# Altium PCB PCB3.PcbDoc
Units mil, origin at the board's own origin, x right, y up, seen from the top; angles counter-clockwise.
Board outline 4055 x 3805 mil, 2 copper layers (Top Layer, Bottom Layer); 64 components, 57 nets, 210 pads, 13 vias.
Unrouted connection lines stored in the file: 1.
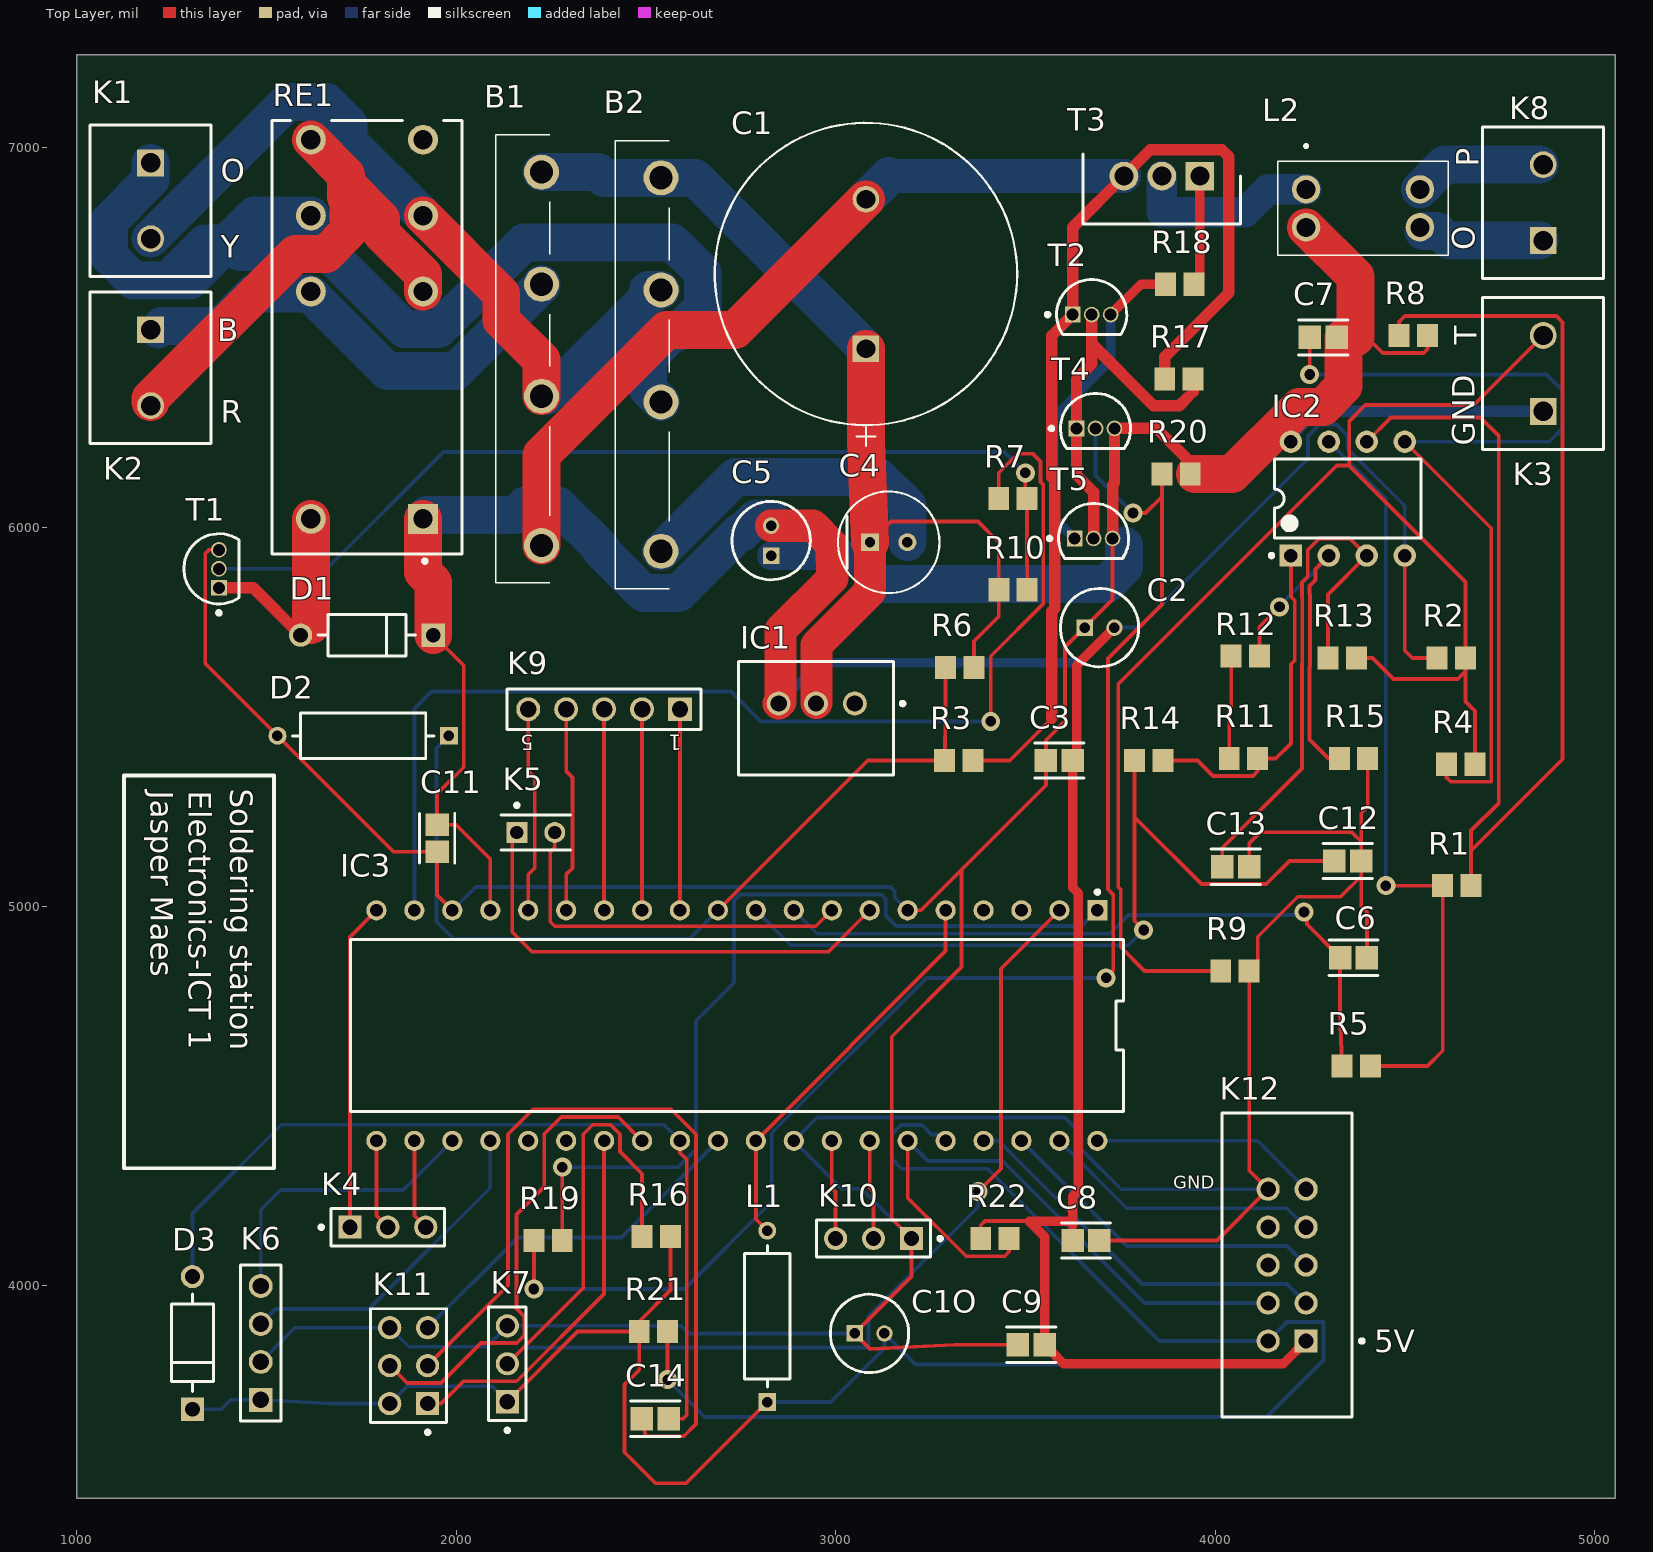
[diagram p0: Top Layer view]
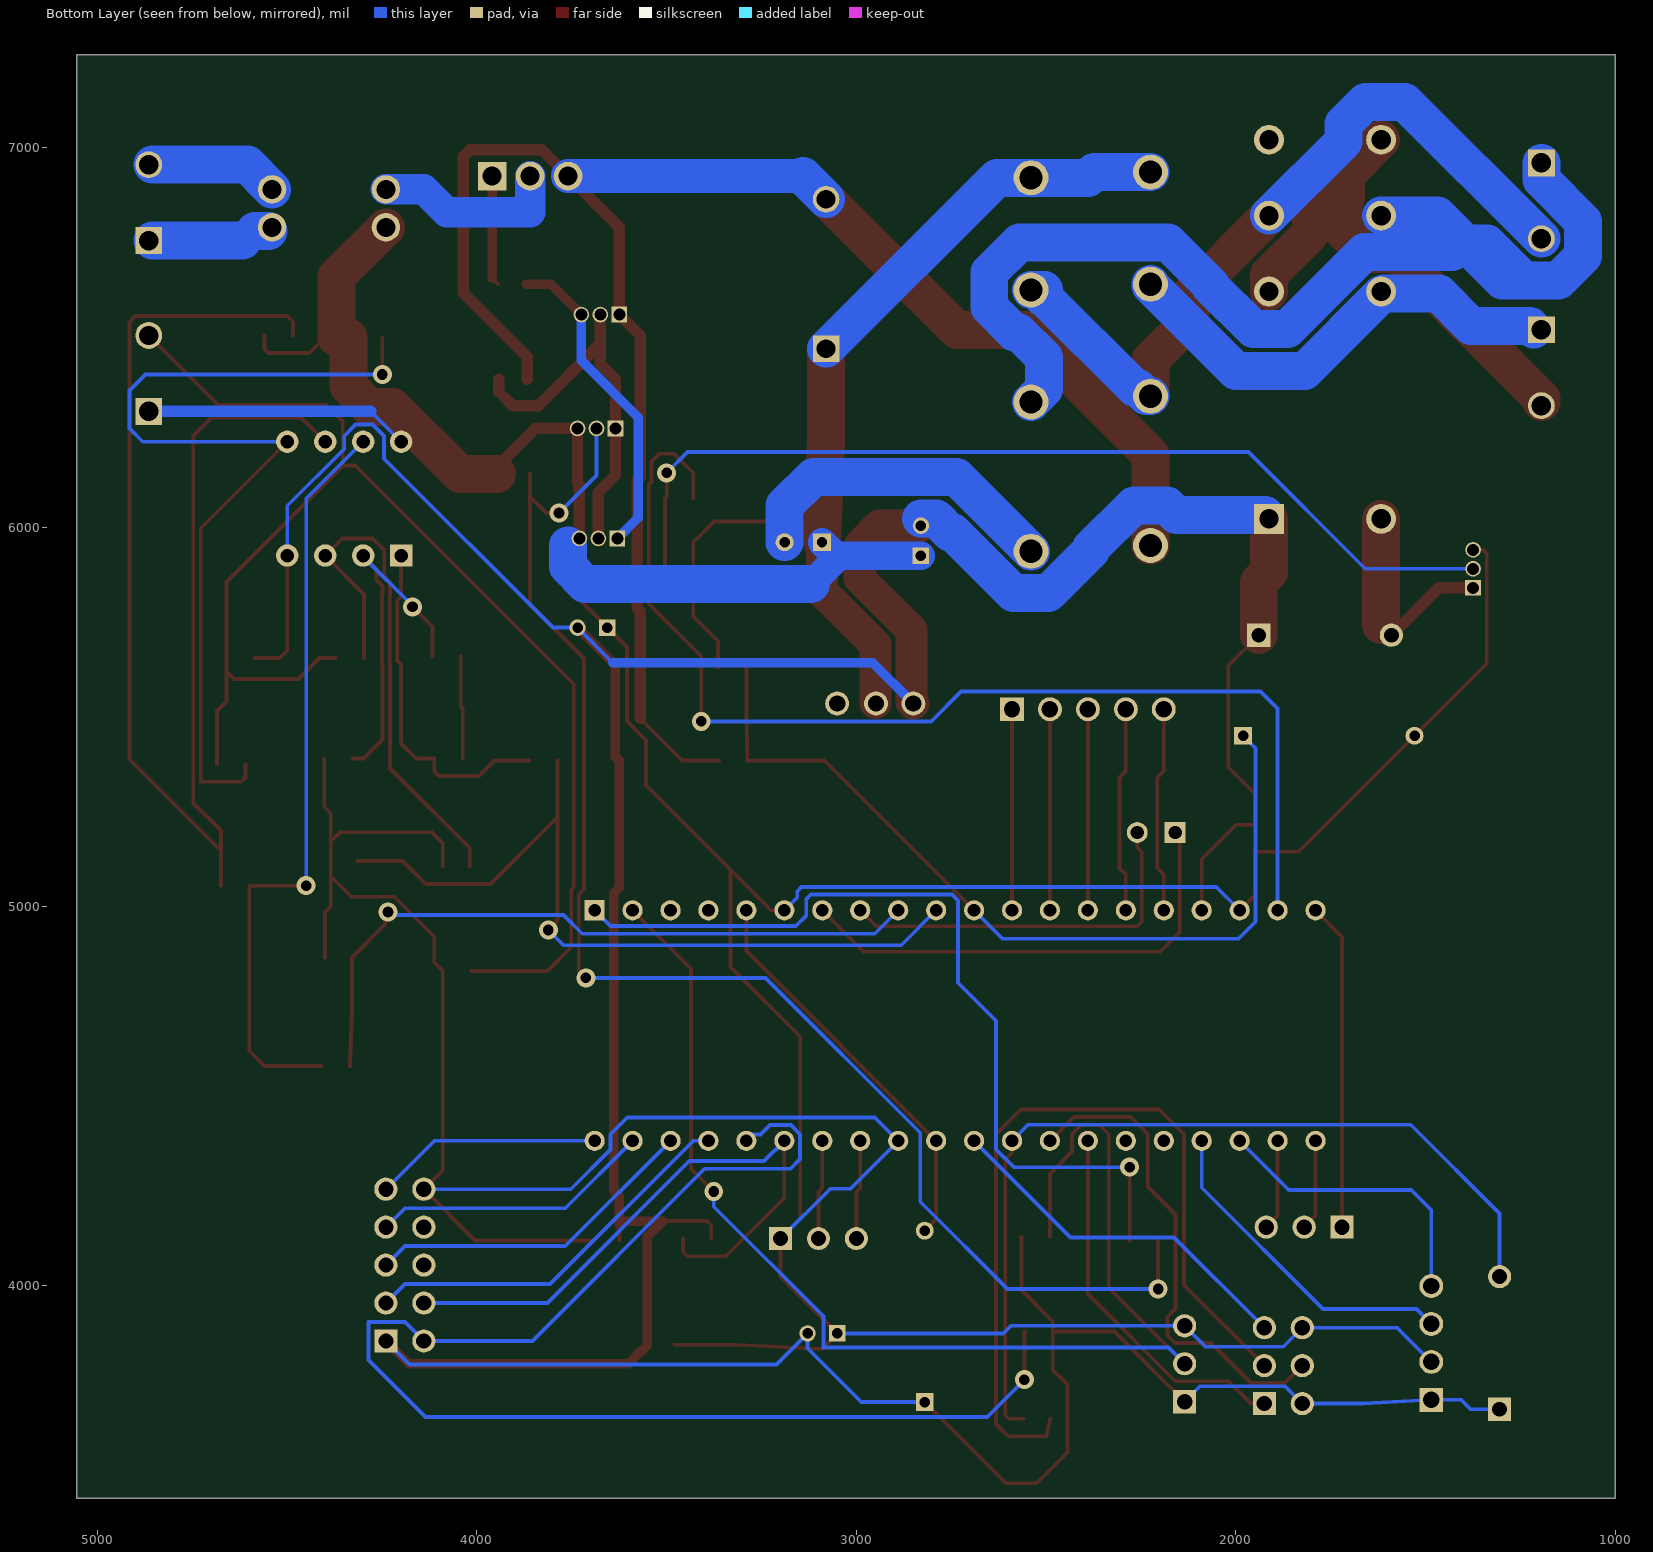
[diagram p1: Bottom Layer view, seen from below]
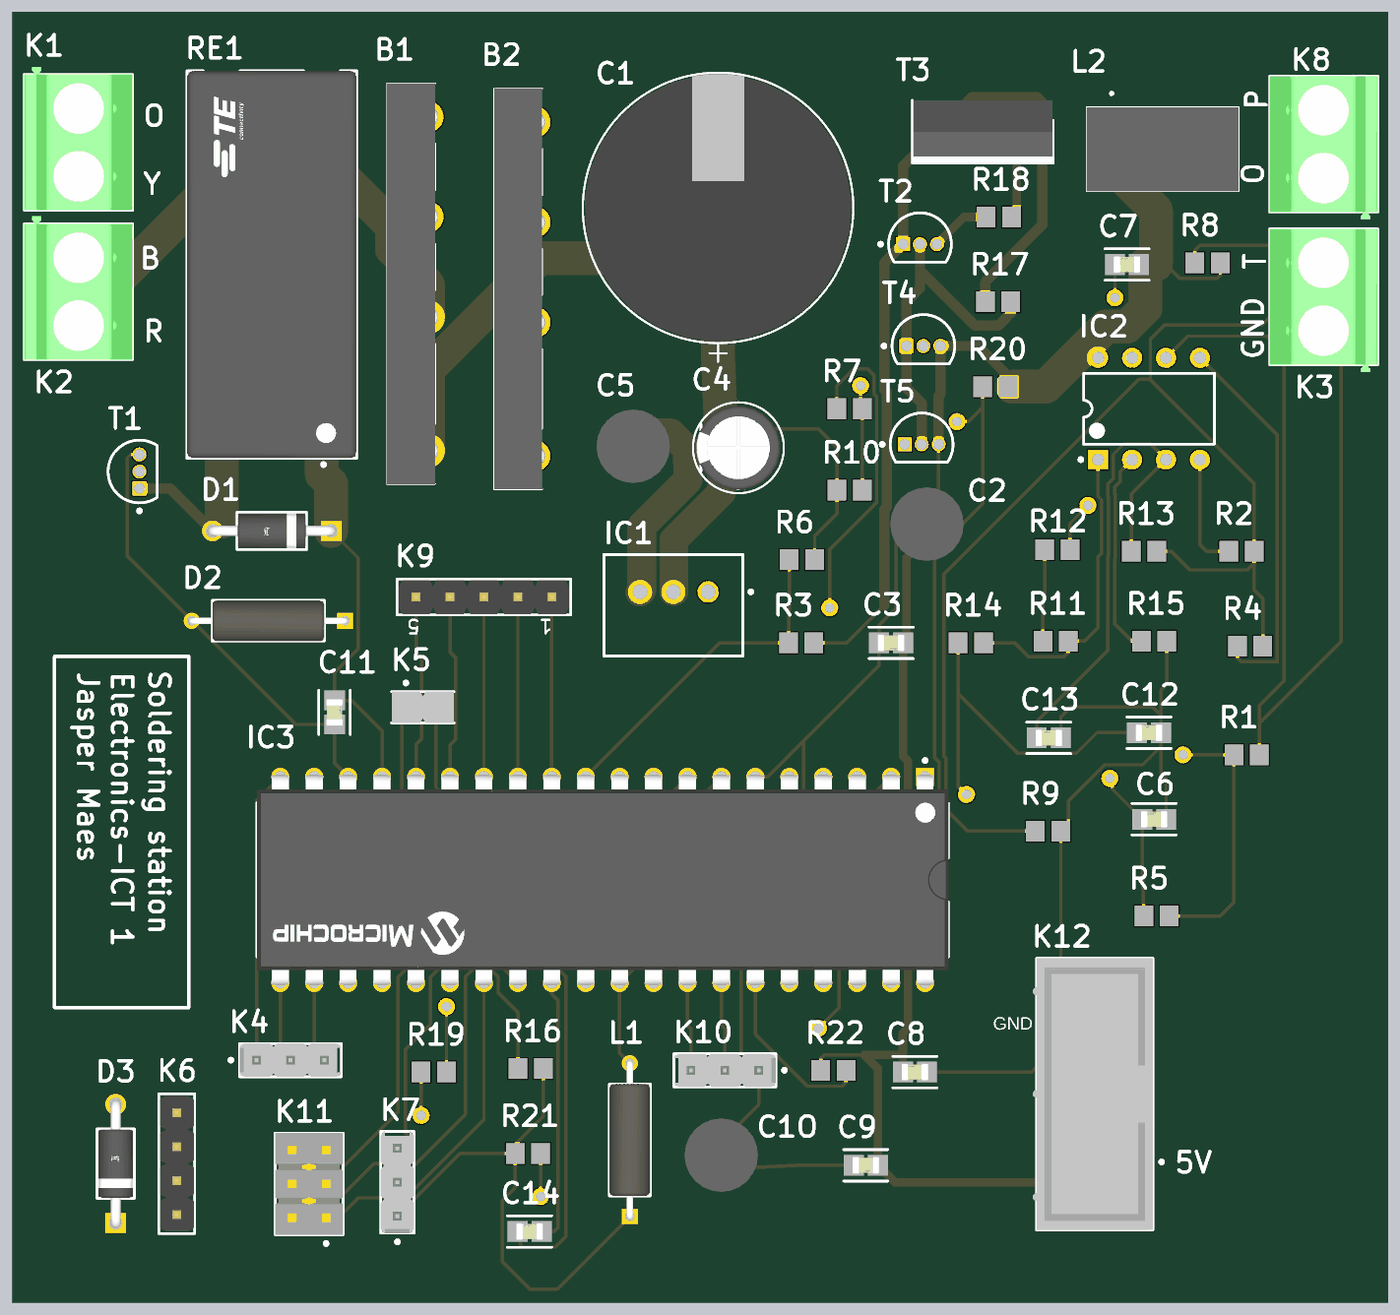
[diagram p2: 3D render of the assembled board from above, using the file's embedded part models]

## Layer stack, top to bottom
Top Solder: solder mask 0.4, Solder Resist, Dk 3.5
Top Layer: signal copper 1.4
Dielectric 1: dielectric 12.6, FR-4, Dk 4.8
Bottom Layer: signal copper 1.4
Bottom Solder: solder mask 0.4, Solder Resist, Dk 3.5

## Board outline
1000,3440 5055,3440 5055,7245 1000,7245

## Design rules (kind name [scope] priority, off if disabled: settings)
Clearance [All] p1: gap=10 ignorepadtopadclearanceinfootprint=FALSE except(0: Arc-Hole Track-Hole SMDPad-Hole THPad-Hole Via-Hole Fill-Hole Poly-Hole Region-Hole Text-Hole; 5: THPad-THPad)
Height [All] p1: minheight=0 maxheight=5000 prefheight=500
PolygonConnect [All] p1: connectstyle=Relief reliefconductorwidth=10 reliefentries=4 polygonreliefangle="90 Angle" airgapwidth=10
RoutingVias [All] p1: holewidth=28 width=50 viastyle="Through Hole" minholewidth=28 minwidth=50 maxholewidth=28 maxwidth=50
SolderMaskExpansion [All] p1: expansion=4 istentingtop=FALSE
UnRoutedNet [All] p1: checkbadconnections=TRUE
Width [All] p1: maxlimit=100 minlimit=10 preferedwidth=10 minimp=50.000000 maximp=50.000000 favimp=50.000000
28 further rules are at their usual default settings.

## Classes and differential pairs
component class Voeding: B1 B2 C1 C4 C5 D1 D2 IC1 K1 K2 R3 R6 R7 R10 RE1 T1
component class temperatuursmeting: C2 C3 C6 C7 C12 C13 IC2 K3 R1 R2 R4 R5 R8 R9 R11 R12 R13 R14 R15
component class Sturing_Bout: K8 L2 R17 R18 R20 T2 T3 T4 T5
component class Main_IC_Sheet: C1O C8 C9 C11 C14 D3 IC3 K4 K5 K6 K7 K9 K10 K11 K12 L1 R16 R19 R21 R22

## Components (designator, comment, footprint, x,y, rotation, side; value= is the part's Value field where it differs from the comment)
B1 "D6KB6U" GSIB1580E345 2225,5951.3 r90 top
B2 "D6KB6U" GSIB1580E345 2540,5936.02 r90 top
C1 "4700µ - 50V" U1-UU_NCH 3080,6470 r90 top
C1O "10µF" CAPPRD200W52D525H1200 3050,3875 r0 top value="0.10 μF"
C2 "10µ - 50V" CAPPRD200W52D525H1200 3656.26,5735 r0 top
C3 "100n" FP-C0805C-DN-IPC_A 3590,5385 r180 top value="0.10 μF"
C4 "100µ - 25V" FP-RAD-TH-D_6_3_0_5-L_11-MFG 3140,5960 r0 top
C5 "10µ - 50V" CAPPRD200W52D525H1200 2830,5925 r90 top
C6 "10n" FP-C0805C-DN-IPC_A 4365,4865 r0 top value="0.10 μF"
C7 "10n" FP-C0805C-DN-IPC_A 4285,6500 r0 top value="0.10 μF"
C8 "100nF" FP-C0805C-DN-IPC_A 3660,4120 r0 top value="0.10 μF"
C9 "100nF" FP-C0805C-DN-IPC_A 3515.46,3845 r180 top value="0.10 μF"
C11 "100nF" FP-C0805C-DN-IPC_A 1950,5180 r270 top value="0.10 μF"
C12 "10n" FP-C0805C-DN-IPC_A 4350,5120 r0 top value="0.10 μF"
C13 "10n" FP-C0805C-DN-IPC_A 4054.54,5105 r0 top value="0.10 μF"
C14 "100nF" FP-C0805C-DN-IPC_A 2524.54,3650 r0 top value="0.10 μF"
D1 "1N4007" FP-1N4007-MFG 1765,5715 r180 top value=15pF
D2 "5V1" FP-IR02-MFG 1755,5450 r180 top
D3 "1N4007" FP-1N4007-MFG 1305,3850 r90 top value=15pF
IC1 "OKI-78SR-5/1.5-W36-C" MURA-OKI-78SR-3 2948.43,5535 r180 top
IC2 "MCP6002-E/P" PDIP300-P8 4350,6075 r90 top
IC3 "ATMEGA4809-PF" FP-C04-016-MFG 2740,4686.25 r270 top
K1 "1729128" PHOE-1729128-2_V 1195,6860 r270 top
K2 "1729128" PHOE-1729128-2_V 1195,6420 r270 top
K3 "1729128" PHOE-1729128-2_V 4865,6405 r90 top
K4 "" MOLX-22-28-4033_V 1820,4155 r0 top
K5 "" TECO-5-146280-2_V 2210,5195 r0 top
K6 "UART2" 61300411121 1485,3850 r90 top
K7 "" MOLX-22-28-4033_V 2135,3795 r90 top
K8 "1729128" PHOE-1729128-2_V 4865,6855 r90 top
K9 "691701320005B" 61300511121 2390,5520 r180 top
K10 "UART0" MOLX-22-28-4033_V 3100,4125 r180 top
K11 "610106249121" SMTC-TSW-103-08-L-D_V 1875,3790 r90 top
K12 "" TECO-1-1634688-0-10_V 4190,4055 r90 top
L1 "10µH" FP-IR02-MFG 2820,3920 r90 top value=10uH
L2 "" CM2545X171B10 4240,6890 r270 top
R1 "18K" RESC2013X60X40ML20T25 4637.4,5055 r0 top
R2 "1M" RESC2013X60X40ML20T25 4622.4,5655 r0 top
R3 "68K" RESC2013X60X40ML20T25 3325,5385 r0 top
R4 "5K6" RESC2013X60X40ML20T25 4647.6,5375 r0 top
R5 "5K6" RESC2013X60X40ML20T25 4372.4,4580 r0 top
R6 "10K" RESC2013X60X40ML20T25 3327.4,5630 r0 top
R7 "10K" RESC2013X60X40ML20T25 3467.4,6075 r0 top
R8 "100E" RESC2013X60X40ML20T25 4522.6,6505 r0 top
R9 "10M" RESC2013X60X40ML20T25 4052.6,4830 r0 top
R10 "4,7K" RESC2013X60X40ML20T25 3467.6,5835 r0 top
R11 "18K" RESC2013X60X40ML20T25 4075,5390 r0 top
R12 "18K" RESC2013X60X40ML20T25 4080,5660 r0 top
R13 "5K6" RESC2013X60X40ML20T25 4335,5655 r0 top
R14 "5K6" RESC2013X60X40ML20T25 3825,5385 r0 top
R15 "100E" RESC2013X60X40ML20T25 4365,5390 r0 top
R16 "4.7K" RESC2013X60X40ML20T25 2527.6,4130 r0 top
R17 "4,7K" RESC2013X60X40ML20T25 3905,6390 r0 top
R18 "100E" RESC2013X60X40ML20T25 3907.4,6640 r0 top
R19 "10k" RESC2013X60X40ML20T25 2242.4,4120 r0 top
R20 "4,7K" RESC2013X60X40ML20T25 3897.4,6140 r0 top
R21 "4,7k" RESC2013X60X40ML20T25 2520,3880 r0 top
R22 "4,7k" RESC2013X60X40ML20T25 3420,4125 r0 top
RE1 "RT424005F" FP-RT424005F-MFG 1765,6500 r90 top
T1 "BC547" ONSC-TO-92-3-29-11 1375,5890 r90 top
T2 "BC547CG" ONSC-TO-92-3-29-11 3675,6560 r0 top
T3 "IRF9Z34NPBF" TO254P469X1042X1967-3P 3960,6925 r180 top
T4 "BC547CG" ONSC-TO-92-3-29-11 3685,6260 r0 top
T5 "BC557C" ONSC-TO-92-3-29-11 3680,5970 r0 top

## Footprints (in the part's own frame and the unit in brackets; to place one, negate y for a bottom-side part, rotate by r counter-clockwise, add the part's x,y. Pads: shape width x height; smd on the part's side, far side on the other; paste and mask are expansions set on the pad)
61300411121 [mm] "Pin Header, pitch 2.54 mm, THT, Vertical, single row, 4p"
  rect 1.6x1.6 hole 1.1: 1(-3.81,0)
  round 1.6 hole 1.1: 2(-1.27,0) 3(1.27,0) 4(3.81,0)
  silkscreen extent -5.23,-1.34 5.23,1.34, body extent -5.08,-1.27 5.08,1.27, height 8.57
61300511121 [mm] "Pin Header, pitch 2.54 mm, THT, Vertical, single row, 5p"
  rect 1.6x1.6 hole 1.1: 1(-5.08,0)
  round 1.6 hole 1.1: 2(-2.54,0) 3(0,0) 4(2.54,0) 5(5.08,0)
  silkscreen extent -6.5,-1.34 6.5,1.34, body extent -6.35,-1.27 6.35,1.27, height 8.57
CAPPRD200W52D525H1200 [mm]
  rect 1.1x1.1 / inner round 1.1 / far side rect 1.1x1.1 hole 0.7: 1(0,0)
  round 1.1 hole 0.7: 2(2,0)
  silkscreen extent -1.62,-2.62 3.63,2.62, body extent -10,-3.38 10,3.38, height 5.8
CM2545X171B10 [mil]
  round 75 hole 50: 1(0,0) 2(100,0) 3(100,300) 4(0,300)
  silkscreen extent -118,-74 174,374, body extent -394,-133 394,133, height 228
FP-1N4007-MFG [mm]
  rect 1.55x1.55 hole 1 paste-1000 mask+0: 1(-4.44,0)
  round 1.55 hole 1 paste-1000 mask+0: 2(4.44,0)
  silkscreen extent -3.27,-1.4 3.27,1.4, body extent -5.32,-1.5 5.32,1.5, height 0.25
FP-C04-016-MFG [mm]
  rect 1.35x1.35 hole 0.85 paste-1000 mask+0: 1(-7.715,24.13)
  round 1.35 hole 0.85 paste-1000 mask+0: 2(-7.715,21.59) 3(-7.715,19.05) 4(-7.715,16.51) 5(-7.715,13.97) 6(-7.715,11.43) 7(-7.715,8.89) 8(-7.715,6.35) 9(-7.715,3.81) 10(-7.715,1.27) 11(-7.715,-1.27) 12(-7.715,-3.81) 13(-7.715,-6.35) 14(-7.715,-8.89) 15(-7.715,-11.43) 16(-7.715,-13.97) 17(-7.715,-16.51) 18(-7.715,-19.05) 19(-7.715,-21.59) 20(-7.715,-24.13) 21(7.715,-24.13) 22(7.715,-21.59) 23(7.715,-19.05) 24(7.715,-16.51) 25(7.715,-13.97) 26(7.715,-11.43) 27(7.715,-8.89) 28(7.715,-6.35) 29(7.715,-3.81) 30(7.715,-1.27) 31(7.715,1.27) 32(7.715,3.81) 33(7.715,6.35) 34(7.715,8.89) 35(7.715,11.43) 36(7.715,13.97) 37(7.715,16.51) 38(7.715,19.05) 39(7.715,21.59) 40(7.715,24.13)
  silkscreen extent -9.07,-25.88 5.76,25.88, body extent -8.49,-26.71 8.49,26.71, height 0.25
FP-C0805C-DN-IPC_A [mil]
  rect 59.24x61.27 smd paste+0 mask+0: 1(-35.46,0) 2(35.46,0)
  silkscreen extent -65,-46 65,46, body extent -85,-50 85,50, height 10
FP-IR02-MFG [mm]
  rect 1.2x1.2 hole 0.7 paste-1000 mask+0: 1(-5.736,0)
  round 1.2 hole 0.7 paste-1000 mask+0: 2(5.736,0)
  silkscreen extent -4.74,-1.53 4.74,1.53, body extent -6.44,-1.63 6.44,1.63, height 0.25
FP-RAD-TH-D_6_3_0_5-L_11-MFG [mm]
  rect 1.2x1.2 hole 0.7 paste-1000 mask+0: 1(-1.25,0)
  round 1.2 hole 0.7 paste-1000 mask+0: 2(1.25,0)
  silkscreen extent -3.4,-3.4 3.4,3.4, body extent -3.5,-3.5 3.5,3.5, height 0.25
FP-RT424005F-MFG [mm]
  round 2 hole 1.3 paste-1000 mask+0: 11(8.15,-3.75) 12(3.07,-3.75) 14(13.23,-3.75) 21(8.15,3.75) 22(3.07,3.75) 24(13.23,3.75) A2(-12.15,3.75)
  rect 2x2 hole 1.3 paste-1000 mask+0: A1(-12.15,-3.75)
  silkscreen extent -15.1,-6.35 14.5,6.35, body extent -14.6,-6.45 14.6,6.45, height 0.25
GSIB1580E345 [mm]
  round 2.34 hole 1.56: 1(0,0) 2(10,0) 3(17.5,0) 4(25,0)
  silkscreen extent -2.5,-0.55 27.5,3.05, body extent -10,-3.38 10,3.38, height 5.8
MOLX-22-28-4033_V [mm] "THD, 3-Leads, Body 7.62x2.49mm, Pitch 2.54mm"
  rect 1.55x1.55 hole 1.02: 1(-2.54,0)
  round 1.55 hole 1.02: 2(0,0) 3(2.54,0)
  silkscreen extent -4.58,-1.25 3.81,1.25, body extent -3.81,-1.24 3.81,1.24, height 8.38
MURA-OKI-78SR-3 [mm] "THMT, 3-Leads, Body 10.4x7.6mm"
  round 1.6 hole 1.1: 1(-2.6,0) 2(0,0) 3(2.5,0)
  silkscreen extent -5.92,-2.8 5.2,4.8, body extent -5.2,-2.8 5.2,4.8, height 16.5
ONSC-TO-92-3-29-11 [mm] "TO, 3-Leads, Body Dia 4.7mm, Pitch 1.27mm"
  rect 1.05x1.05 hole 0.8: 1(-1.27,0)
  round 1.05 hole 0.8: 2(0,0) 3(1.27,0)
  silkscreen extent -3.07,-1.34 2.35,2.35, body extent -2.35,-1.33 2.36,2.36, height 7.87
PDIP300-P8 [mm] "8-Pin Plastic Dual In-Line Package (PDIP)"
  rect 1.5x1.5 hole 0.9: 1(-3.81,3.81)
  round 1.5 hole 0.9: 2(-3.81,1.27) 3(-3.81,-1.27) 4(-3.81,-3.81) 5(3.81,-3.81) 6(3.81,-1.27) 7(3.81,1.27) 8(3.81,3.81)
  silkscreen extent -3.93,-4.9 2.65,5.23, body extent -3.55,-4.9 3.55,4.9, height 4.32
PHOE-1729128-2_V [mm] "Receptacle, 2-Leads, Body 8.1x10.16mm, Pitch 5.08mm"
  rect 1.8x1.8 hole 1.3: 1(-2.54,0)
  round 1.8 hole 1.3: 2(2.54,0)
  silkscreen extent -5.08,-4.05 5.08,4.05, body extent -5.65,-4.05 5.08,4.05, height 10.01
RESC2013X60X40ML20T25 [mm] "Chip Resistor, 2-Leads, Body 2.00x1.25mm, IPC Low Density"
  rect 1.4x1.55 smd: 1(-0.95,0) 2(0.95,0)
  body extent -1.1,-0.72 1.1,0.72, height 0.6
SMTC-TSW-103-08-L-D_V [mm] "CONN, 6-Leads, Body 7.62x5.08mm, Pitch 2.54mm"
  rect 1.55x1.55 hole 1.02: 1(-2.54,-1.27)
  round 1.55 hole 1.02: 2(-2.54,1.27) 3(0,-1.27) 4(0,1.27) 5(2.54,-1.27) 6(2.54,1.27)
  silkscreen extent -4.58,-2.54 3.81,2.54, body extent -3.81,-2.54 3.81,2.54, height 8.38
TECO-1-1634688-0-10_V [mm] "10-Pin Connector, Body 20.35x8.7mm, Pitch 2.54mm"
  rect 1.55x1.55 hole 1.02: 1(-5.08,-1.27)
  round 1.55 hole 1.02: 2(-5.08,1.27) 3(-2.54,-1.27) 4(-2.54,1.27) 5(0,-1.27) 6(0,1.27) 7(2.54,-1.27) 8(2.54,1.27) 9(5.08,-1.27) 10(5.08,1.27)
  silkscreen extent -10.18,-5.13 10.18,4.35, body extent -10.17,-4.35 10.18,4.65, height 9
TECO-5-146280-2_V [mm] "Connector, 2-Leads, Body 4.67x2.34mm, Pitch 2.54mm"
  rect 1.4x1.4 hole 0.89: 1(-1.27,0)
  round 1.4 hole 0.89: 2(1.27,0)
  silkscreen extent -2.34,-1.17 2.34,1.94, body extent -2.34,-1.17 2.34,1.17, height 5.33
TO254P469X1042X1967-3P [mm]
  rect 1.92x1.92 / inner round 1.92 / far side rect 1.92x1.92 hole 1.28: 1(0,0)
  round 1.92 hole 1.28: 2(2.54,0) 3(5.08,0)
  silkscreen extent -2.73,-1.49 7.81,3.2, body extent -10,-3.38 10,3.38, height 5.8
U1-UU_NCH [mil]
  rect 70x70 / inner round 60 / far side rect 70x70 hole 50 paste-35 mask+0: 1(0,0)
  round 70 / inner round 60 / far side round 70 hole 50 paste-35 mask+0: 2(394,0)
  silkscreen extent -256,-398 595,398, body extent -196,-393 591,393, height 1566

## Part data
B1 B2: library part GSIB1580-E3_45, "Bridge Rectifier Diode 15A 800V GSIB-5S", Manufacturer_Name=Vishay, Manufacturer_Part_Number=GSIB1580-E3/45, Mouser Part Number=625-GSIB1580-E3, Datasheet Link=http://www.vishay.com/docs/88644/gsib15xx.pdf, Geometry.Height=20.3mm, Mouser Price/Stock=https://www.mouser.co.uk/ProductDetail/Vishay-General-Semiconductor/GSIB1580-E3-45?qs=NyKJzQ80QAwZu8Guxd36Tw%3D%3D
C1 C2 C4 C5: library part CMP-05427-000897-1, "Aluminum Electrolytic Capacitors (Radial Lead Type) 100uF ±20% 25V", Capacitance=100uF, Case/Package=Radial, ESR (Equivalent Series Resistance)=130mR, Max Operating Temperature=105°C, Min Operating Temperature=-40°C, Package Quantity=2000, Ripple Current=455mA, Tolerance=20%, Voltage Rating=25V, Diameter=6.3mm, Features="General Purpose", Height=11.2mm, Height - Seated (Max)=0.441inch, Impedance=130mR, Lead Diameter=0.5mm, Lead Free="Lead Free", Lead Pitch=5mm, Length=11.2mm, Life (Hours)=2000Hour, Mount="Through Hole", Packaging="Tape and Reel", Polarity=Polar, Radiation Hardening=No, RoHS Compliant=Yes, Series=FR, Termination=Radial, Voltage Rating (DC)=25V
C1O C3 C6 C7 C8 C9 C11 C12 C13 C14: library part CMP-2007-00279-2, "CAP CER 0.1UF 50V X7R 0805", Capacitance="0.10 μF", Manufacturer=KEMET, Manufacturer Part Number=C0805C104K5RACTU, Package=C0805C-DN, Temperature="-55°C to +125°C", Temperature Characteristic=X7R, Temperature Coefficient=30ppm/°C, Temperature Range High=+125°C, Temperature Range Low=-55°C, Tolerance=0.1, Voltage Rating="50 V", Automotive=No, Category=Cap, ComponentLink2Description=Datasheet, ComponentLink2URL=https://content.kemet.com/datasheets/KEM_C1003_C0G_SMD.pdf, Device Class L1="Passive Components", Device Class L2=Capacitors, Device Class L3="Ceramic Capacitors", Digikey Description="CAP CER 0.1UF 50V X7R 0805", Height=0.88mm, Ipc Land Pattern Name=CAPC200125X78, Lead Free=Yes, Material=Ceramic, Mouser Description="Cap Ceramic 0.1uF 50V X7R 10% SMD 2.0 x 1.2 mm 125 C Paper T/R", Octopart=https://octopart.com/c0805c104k5ractu-kemet-143926, RoHS=TRUE
D1 D3: library part CMP-123542-000001-1, "Rectifier diode 1000 V 1 A DO-41, ,", Capacitance=15pF, Forward Current=1A, Manufacturer=Diotec, Max Junction Temp=+175°C, Max Repetitive Reverse Voltage=1000V, Max Surge Forward Current=27A, Peak Reverse Current=5uA, Temperature="-50°C to +175°C", Temperature Range Low=-50°C, Automotive=No, Category=Diode, ComponentLink2Description=Datasheet, ComponentLink2URL=https://datasheet.octopart.com/1N4007-Diotec-datasheet-62346875.pdf, Device Class L1="Discrete Semiconductors", Device Class L2=Diodes, Device Class L3="Rectifier Diodes", Height=2.8mm, Ipc Land Pattern Name=DIOAD888W100L520D280, Lead Free=Yes, Manufacturer Part Number=1N4007, Octopart=https://octopart.com/1n4007-diotec-4040411, Package=1N4007, Reverse Voltage=1000V, RoHS=TRUE, Temperature Range High=+175°C
D2: library part CMP-1060-00390-1, "Zener Voltage Regulator, 500 mW, 2-Pin SOD-123, Pb-Free, Tape and Reel", Manufacturer="On Semiconductor", PartNumber=MMSZ4689ET1G, ComponentLink1Description="Manufacturer URL", ComponentLink1URL=http://www.onsemi.com/, ComponentLink2Description=Datasheet, ComponentLink2URL=http://www.onsemi.com/pub_link/Collateral/MMSZ4678ET1-D.PDF, ComponentLink3Description="Package Specification", ComponentLink3URL=http://www.onsemi.com/pub_link/Collateral/425-04.PDF, DatasheetVersion="Rev. 6", Mounting Technology="Surface Mount", P Max (W)=0.5, PackageDescription="2-Pin SOD, Body 1.6 x 2.69 mm", PackageReference=SOD-123-2-425-04, PackageVersion="Rev. G, 10/2009", Packing="Tape and Reel", RoHS=Pb-Free, VZ Typ (V)=5.1
IC1: library part CMP-2000-05274-1, "Non-Isolated DC/DC Converter, 7.5 W, 7 to 36 V, 1.5 A, -40 to 85 degC, 3-Pin THD, RoHS", Current - Output (Max)=1.5A, Manufacturer=Murata, Operating Temperature=-40degC~85degC, Package / Case=3-SIPModule, Power (Watts) - Manufacture Series=8W, Voltage - Input (Max)=36V, Voltage - Input (Min)=7V, Voltage - Isolation=-, Voltage - Output 1=5V, Applications=ITE(Commercial), Category=PowerSupplies-BoardMount, Datasheet URL=https://datasheet.ciiva.com/8006/1790439-8006672.pdf, Datasheet Version=Oct-13, Efficiency=90.5%, Family=DCDCConverters, Features=SCP, Manufacturer URL=http://www.murata.com/, Mounting Type=ThroughHole, Number of Outputs=1, Packaging=Tube, Power (Watts) - Max=8W, Series=Okami™OKI-78SR, Size / Dimension="0.41\"Lx0.30\"Wx0.65\"H(10.4mmx7.6mmx16.5mm)", Type=LinearRegulatorReplacement, Voltage - Output 2=-, Voltage - Output 3=-
IC2: library part CMP-0187-00133-3, "None", Case/Package=PDIP, Input Bias Current=1pA, Input Offset Voltage (Vos)=4.5mV, Max Operating Temperature=125°C, Max Supply Voltage=6V, Min Operating Temperature=-40°C, Min Supply Voltage=1.8V, Nominal Supply Current=100uA, Operating Supply Voltage=5.5V, Output Current=23mA, Package Quantity=60, Power Supply Rejection Ratio (PSRR)=86dB, Voltage Gain=112dB, Amplifier Type="GENERAL PURPOSE", Bandwidth=1MHz, Common Mode Rejection Ratio=60dB, Gain Bandwidth Product=1MHz, Height=3.3mm, Input Offset Voltage-Max=4.5mV, Lead Free="Lead Free", Length=9.27mm, Mount="Through Hole", Number of Amplifiers=2, Number of Channels=2, Number of Circuits=2, Number of Elements=2, Number of Pins=8, Operating Supply Current=100uA, Output Current per Channel=23mA, Packaging=Rail/Tube, Radiation Hardening=No, REACH SVHC="No SVHC", RoHS Compliant=Yes, Slew Rate=0.6V/µs, Slew Rate-Nom=0.6V/µs, Supply Current=100uA, Technology=CMOS, Unity Gain Bandwidth Product=1MHz, Width=6.35mm
IC3: library part CMP-06276-000616-1, "IC MCU 8BIT 48KB FLASH 40DIP", RoHS Compliant=Yes
K1 K2 K3 K8: library part CMP-2000-05815-1, "PCB Terminal Block, 13.5 A, 400 V, 2-Pin THD, RoHS, Bulk", Current Rating=13500mA, Manufacturer="Phoenix Contact", Package Description="2-Pin Through Hole Device, Body 8.1 x 10.16 mm, Pitch 5.08 mm", Package Reference=1729128-2, Package Version=03/2015, Voltage Rating=400V, Datasheet URL=https://datasheet.ciiva.com/16046/1729128-16046181.pdf, Datasheet Version=12/2013, Manufacturer URL=http://www.phoenixcontact.com/, Mounting Technology=ThroughHole, No. of Positions=2, No. of Rows=1, Orientation=Horizontal, Package URL=https://www.phoenixcontact.com/online/portal/pi/pxc/product_detail_page/!ut/p/b1/3VdJjqNKFDxLH8AFycySyWY2ozFsEPOMMQaDOX1XedGL_1Vdm5YXJleknhSKeBkvI6EA8ncAo3AYoDhBQGco6KN7VURTdemj9us_IEKEZo_YHiPAEWEFmDGOHMORkqKYCORBZxgL7ZoaZYcbFFUZ3fqxSY6GOuxydWUuHqz1ynmMFygu583Bob0Ewr6Sd_l-5m-kAueHiB0jpRwZwe58wwtkpxtMYd_LmGcDRU02dRNEyWt6Y2ti5pSyJ_reIkzIulrqApdnbT11V5jnCKbYNCvhEM1MCpPByat_X379-iThf08CI5GfOPqfBeS3BRoBOdD55AKVv0iLwCMq-2BrzXWSGRH7pUGD9uwXQjiph3xL0DKQwdGa0JImiIOmBNOestqgwTHSSs2oOep-78apyXQBvNi8ZLaFjvjWvcaUEBu0MC6Wbe-d6mB0FAebo2lUWinqYaZs5DAYzV0RP9yitUjnGJ0iI9xhZkT42OCQNUJJhkgWINNQLP2JFP6OpMg3JCVg70jqHT0lvKOnhHf0lPuOnnLf0VPuWx6_dxwUIvwk5WMkT0kLL1mh61l2yZVSzG3pYV_bqo-mj6uMKwKwdnnW8Jh5RTOJzMOA5c-eJDaZQw4mTMPH02PvS_ZAqNVjVTo2WyYLkwH_KU1mmmG5kjRhDqPXLwwVHvVOjCM60-fpXvTDfMGW1PVFVS1r4e4yVDk4ZdNbkUHvqPqQSeian4UD39fNKmachqdJ1NJbyk8rXT9mXTvPk3oE5meulKGgiruPJek-4I9hTT6G8ZLOyRSm2RRVbThERQad5OS28hdt4YW4vG0stgYYzsWsK4_7y6DZMjJSCqri1kyiZR5vD7pwIrNR7QwPHTcLTI5qT7eRlpHrdGiupYlqQDJ7zy_CND8fWWBoLRXxk1RVcXiBQwbTD4Xi7KL-FuO94t9xaqweXzH, Packing=Bulk, PartNumber=1729128, Pitch=5.08mm, RoHS=TRUE
K4 K7 K10: library part CMP-1676-00001-5, "Male Header, Pitch 2.54 mm, 1 x 3 Position, Height 8.38 mm, Tail Length 3.18 mm, RoHS, Bulk", Colour=Black, Current Rating="4 A", Manufacturer=Molex, Max Operating Temperature="75 degC", Min Operating Temperature="0 degC", Package Quantity=1, Voltage Rating="250 V", ComponentLink1Description="Manufacturer URL", ComponentLink1URL=http://www.molex.com/, ComponentLink2Description=Datasheet, ComponentLink2URL=http://www.molex.com/pdm_docs/sd/022284033_sd.pdf, Contact Finish=Gold, Contact Material=Brass, Contact Plating=Gold, DatasheetVersion="Rev. G, 01/2012", Height="8.38 mm", Lead Pitch="0.1 inch", Length="7.62 mm", Mount="Through Hole", Mounting Technology="Through Hole", PackageDescription="Male Header, Pitch 2.54 mm, 1 x 3 Position, Height 8.38 mm, Tail Length 3.18 mm", PackageReference=22-28-4033, Packaging=Bulk, Pins=3, REACH SVHC=Unknown, RoHSCompliant=true, Rows=1
K5: library part CMP-2000-07492-1, "Male Header, Pitch 2.54 mm, 1 x 2 Position, Height 8.21 mm, Tail Length 3.05 mm, -65 to 105 degC, RoHS, Bulk", Case\/Package=100, Colour=Black, Current Rating=3A, Flammability Rating=UL94V-0, High Temperature Housing=Yes, Manufacturer="TE Connectivity", Max Current Rating=5A, Max Operating Temperature=105degC, Min Operating Temperature=-65degC, Package Description="Male Header, Pitch 2.54 mm, 1 x 2 Position, Height 8.21 mm, Tail Length 3.05 mm", Package Quantity=500, Package Reference=5-146280-2, Approvals=CSA, Board Standoff=No(Without), Connector Type=Header, Contact Gender=Male, Contact Material=CopperAlloy, Contact Mating Length=0.23inch, Contact Plating=Matte, Contact Protection=No(Without), Contact Shape=Square, Datasheet URL=http://www.te.com/commerce/DocumentDelivery/DDEController?Action=showdoc&DocId=Customer+Drawing%7F146280%7FH1%7Fpdf%7FEnglish%7FENG_CD_146280_H1.pdf%7F5-146280-2, Datasheet Version="Rev. H1, 08/2016", Depth=2.34mm, Gasket=No(Without), High Speed Serial Data Connector=No, Housing Colour=Black, Housing Material=Polymer, Keyed=No, Length=4.67mm, Manufacturer URL=http://www.te.com/, Mating Alignment=No(Without), Mating Connector Lock=No(Without), Mating Post Length=0.23inch, Mount=ThroughHole, Mounting Technology=ThroughHole, Number of Contacts=2, Number of Positions=2, Number of Rows=1, Orientation=Straight, Packaging=Carton, Panel Mount Retention=No(Without), PCB Mount Retention=Without, PCB Mounting Orientation=Vertical, PCB Thickness=0.063inch, Pitch=2.54mm, Radiation Hardening=No, RoHSCompliant=true, Row Spacing=2.54mm, Selectively Loaded=No(Without), Stabilizers=No(Without), Termination=ThroughHole, Termination Post Length=0.12inch
K6: library part CMP-1502-01064-1, "THT Vertical Pin Header WR-PHD, Pitch 2.54 mm, Single Row, 4 pins", Contact Resistance=20mOhm, Manufacturer="Wurth Elektronik", Operating Temperature=-40to105degC, Package Reference=61300411121, Rated Current=3A, Withstanding Voltage=500VAC, Working Voltage=250VAC, Datasheet URL=https://katalog.we-online.de/em/datasheet/6130xx11121.pdf, Gender=Male, Manufacturer URL=http://www.we-online.de, Mounting Technology=THT, Orientation=Vertical, Packaging=Bag, Part Number=61300411121, Pin Number=4, Pitch=2.54mm, Publisher=WurthElektronik, Row Number=Single
K9: library part CMP-1502-01995-1, "Serie 7013 B - 3.81mm Vertical PCB Header THR Type with Flanges WR-TBL, 5 pin", Manufacturer="Wurth Elektronik", Operating Temperature=-40to105degC, Datasheet URL=http://katalog.we-online.de/em/datasheet/6917013200xxB.pdf, Gender=Male, Manufacturer URL=http://www.we-online.de, Mounting Technology=SMT, Package Reference=691701320005B, Packaging=TapeandReelwithCap, Part Number=691701320005B, Pin Number=5, Pitch=3.81mm, Publisher=WurthElektronik
K11: library part CMP-1502-01146-1, "SMT Angled Pin Header WR-PHD, Pitch 2.54 mm, Dual Row, 6 pins", Contact Resistance=20mOhm, Manufacturer="Wurth Elektronik", Operating Temperature=-40to105degC, Rated Current=3A, Withstanding Voltage=600VAC, Working Voltage=250VAC, Datasheet URL=https://katalog.we-online.de/em/datasheet/6101xx249121.pdf, Gender=Male, Manufacturer URL=http://www.we-online.de, Mounting Technology=SMT, Orientation=Angled, Package Reference=610106249121, Packaging=TapeandReel, Part Number=610106249121, Pin Number=6, Pitch=2.54mm, Publisher=WurthElektronik, Row Number=Dual
K12: library part CMP-2000-05854-1, "Male Header, Pitch 2.54 mm, 2 x 5 Postion, Height 9.15 mm, Tail Length 3.2 mm, -40 to 105 degC, RoHS, Bulk", Manufacturer="TE Connectivity", Package Description="10-Pin Connector, Body 20.35 x 8.7 mm, Pitch 2.54 mm", Package Reference=1-1634688-0, Package Version="Rev. C2, 02/2011", Contact Material=Brass, Contact Plating=GoldPlatedContacts, Contact Termination Type=ThroughHole, Datasheet URL=https://datasheet.ciiva.com/6831/eng-cd-1634688-c2-6831201.pdf, Datasheet Version="Rev. C2, 02/2011", Gender=Header, Manufacturer URL=http://www.te.com/, Mounting Technology=ThroughHole, No. of Contacts=10Contacts, No. of Positions=10, No. of Rows=2, Orientation=Straight, Package URL=https://datasheet.ciiva.com/6831/eng-cd-1634688-c2-6831201.pdf, PartNumber=1-1634688-0, Pitch=2.54mm, Pitch Spacing=2.54mm, Product Range=-, SVHC=ToBeAdvised
L1: library part CMP-03630-000001-1, "IR-2 10 10% B08", Inductance=10uH, Manufacturer="Vishay Dale", Manufacturer Part Number=IR02BH100K, Package=IR02, Saturation Current=130mA, Self Resonant Frequency=50MHz, Series Resistance=3.7Ω, Temperature="-55°C to +105°C", Temperature Range High=+105°C, Temperature Range Low=-55°C, Test Frequency=7.9MHz, Tolerance=10%, Automotive=No, Category=Ind, ComponentLink2Description=Datasheet, ComponentLink2URL=https://datasheet.ciiva.com/8536/ir-8536517.pdf, Core Material=Iron, Device Class L1="Passive Components", Device Class L2=Inductors, Device Class L3="Fixed Inductors", Digikey Description="IR-2 10 10% B08", Height=3.05mm, Ipc Land Pattern Name=CAPAD1147W70L838D305, Lead Free=Yes, Mouser Description="Fixed Inductors 10uH 10%", Obsolete Part=true, Octopart=https://octopart.com/ir02bh100k-vishay+dale-39675774, Q Factor=55, RoHS=TRUE
L2: library part CM2545X171B-10_1, "Common Mode Chokes Dual 170Ohm 100MHz 10A 0.01Ohm DCR Thru-Hole Bulk", Manufacturer_Name="Laird Technologies", Manufacturer_Part_Number=CM2545X171B-10, Mouser Part Number=N/A, Datasheet Link=https://datasheet.datasheetarchive.com/originals/dk/DKDS-7/122753.pdf, Geometry.Height=9.5mm, Mouser Price/Stock=https://www.mouser.co.uk/ProductDetail/Laird/CM2545X171B-10?qs=PzGy0jfpSMtNfkEypgU65A%3D%3D
R1 R2 R3 R4 R5 R6 R7 R8 R9 R10 R11 R12 R13 R14 R15 R16 R17 R18 R19 R20 R21 R22: library part CMP-2001-00629-1_1, Manufacturer=Panasonic, Part Number=ERA6AEB332V
RE1: library part CMP-03395-000296-1, "RELAY GENERAL PURPOSE DPDT 8A 5V", Coil Current=80.6mA, Coil Power=500mW, Coil Resistance=62R, Coil Voltage (DC)=5V, Contact Current Rating=8A, Contact Voltage Rating (AC)=250V, Dropout Voltage=500mV, Max Operating Temperature=85°C, Max Voltage Rating (AC)=400V, Min Operating Temperature=-40°C, Package Quantity=5000, Power Consumption=400mW, Coil Type=Non-Latching, Contact Material=Silver, ELV=Compliant, Height=15.7mm, Lead Free="Lead Free", Length=29mm, Mount="Through Hole", Operate Time=7ms, Packaging=Carton, Radiation Hardening=No, Relay Type="General Purpose", Release Time=3ms, RoHS Compliant=Yes, Series=RT2, Termination=PCB, Throw Configuration=DPDT, Weight=13g, Width=12.7mm
T1: library part CMP-1048-01464-1, "Amplifier Transistor, NPN Silicon, 3-Pin TO-92, Pb-Free, Bulk Box", Manufacturer="On Semiconductor", PartNumber=BC547CG, ComponentLink1Description="Manufacturer URL", ComponentLink1URL=http://www.onsemi.com/, ComponentLink2Description=Datasheet, ComponentLink2URL=http://www.onsemi.com/pub_link/Collateral/BC546-D.PDF, ComponentLink3Description="Package Specification", ComponentLink3URL=http://www.onsemi.cn/pub_link/Collateral/2N6426-D.PDF, DatasheetVersion="Rev. 7", fT Min (MHz)=150, IC Continuous (A)=0.1, Mounting Technology="Through Hole", PackageDescription="3-Pin Transistor Outline, Body 4.825 x 3.685 mm, Pitch 1.27 mm", PackageReference=TO-92-3-29-11_AM_SL, PackageVersion="Rev. AM", Packing="Bulk Box", Polarity=NPN, RoHS=TRUE
T2 T4: library part CMP-1048-01464-1, "Amplifier Transistor, NPN Silicon, 3-Pin TO-92, Pb-Free, Bulk Box", Manufacturer="On Semiconductor", ComponentLink1Description="Manufacturer URL", ComponentLink1URL=http://www.onsemi.com/, ComponentLink2Description=Datasheet, ComponentLink2URL=http://www.onsemi.com/pub_link/Collateral/BC546-D.PDF, ComponentLink3Description="Package Specification", ComponentLink3URL=http://www.onsemi.cn/pub_link/Collateral/2N6426-D.PDF, DatasheetVersion="Rev. 7", fT Min (MHz)=150, IC Continuous (A)=0.1, Mounting Technology="Through Hole", PackageDescription="3-Pin Transistor Outline, Body 4.825 x 3.685 mm, Pitch 1.27 mm", PackageReference=TO-92-3-29-11_AM_SL, PackageVersion="Rev. AM", Packing="Bulk Box", PartNumber=BC547CG, Polarity=NPN, RoHS=TRUE
T3: "MOSFET MOSFT PCh -55V -17A 100mOhm 23.3nC", Manufacturer_Name=Infineon, Mouser Part Number=942-IRF9Z34NPBF, Datasheet Link=https://www.infineon.com/dgdl/irf9z34npbf.pdf?fileId=5546d462533600a40153561220af1ddd, Geometry.Height=4.69mm, Manufacturer_Part_Number=IRF9Z34NPBF, Mouser Price/Stock=https://www.mouser.co.uk/ProductDetail/Infineon-Technologies/IRF9Z34NPBF?qs=9%252BKlkBgLFf16a%2FvlD%252BMCtQ%3D%3D
T5: library part CMP-1048-01449-1, "Amplifier Transistor, PNP Silicon, 3-Pin TO-92, Bulk Box", Manufacturer="On Semiconductor", ComponentLink1Description="Manufacturer URL", ComponentLink1URL=http://www.onsemi.com/, ComponentLink2Description=Datasheet, ComponentLink2URL=http://www.onsemi.com/pub_link/Collateral/BC556B-D.PDF, ComponentLink3Description="Package Specification", ComponentLink3URL=http://www.onsemi.cn/pub_link/Collateral/2N6426-D.PDF, DatasheetVersion="Rev. 3", IC Continuous (A)=-0.1, Mounting Technology="Through Hole", PackageDescription="3-Pin Transistor Outline, Body 4.825 x 3.685 mm, Pitch 1.27 mm", PackageReference=TO-92-3-29-11_AM_SL, PackageVersion="Rev. AM", Packing="Bulk Box", PartNumber=BC557C, Polarity=PNP, RoHS=FALSE

## Via types
v1: diameter 50, hole 28, Top Layer to Bottom Layer, 13 vias

## Nets (pads, with @x,y where several pads share a name; then routed paths per layer and width w, separated by ;. In a path a pad name is that pad's centre, name@x,y a point inside that pad or via, vN(x,y) a via of type N, cw(c..) or ccw(c..) an arc to the next point about the centre after c; other vN are vias at no path point)
+5: C1O.2 C2.2 C3.1 C5.2 C8.1 C9.1 C11.1 D1.1 D3.1 IC1.3 IC2.4 IC3.17 K6.1 K7.1 K11.2 K12.1 L1.1 R2.1 R16.2 R21.1 R22.1 RE1.A1 | length 12567.9
  Top Layer w10: D1.1 2020,5634.8 2020,5367 1950,5297 C11.1 2000,5215.46 2090,5125.46 IC3.17 ; K7.1 2320,3880 R21.1 ; R16.2 2565,3989 2482.6,3906.6 R21.1 ; L1.1 2605.83,3480 2525.83,3480 2444,3561.83 2444,3740.4 2482.6,3779 R21.1 ; R22.1 3382.6,4160 3393.6,4171 3510,4171 ; 3613.54,4171 3624.54,4160 C8.1 ; IC2.4 4500,5675 4520,5655 R2.1
  Top Layer w25: 3613.54,4171 3510,4171 3550.93,4130.07 C9.1 3550.93,3843.98 3568.05,3826.87 3569.06,3826.87 3600.93,3795 4180,3795 K12.1 ; 3624.54,4160 3624.54,4236 3640,4251.46 3640,5035 3625.46,5049.54 C3.1 3635,5394.54 3635,5635 C2.2
  Top Layer w85: C5.2 2940.02,6003.74 2988.39,5955.36 2990,5915.83 2991.42,5914.41 2991.42,5865.12 2855,5728.7 2855,5540 IC1.3
  Top Layer w100: RE1.A1 1912.64,5881.17 1939.8,5854 D1.1
  Bottom Layer w10: D3.1 1382,3675.2 1406.8,3700 K6.1 1665,3690 K11.2 1871,3736 2094,3736 K7.1 ; L1.1 2987.17,3694.17 3128.74,3835.74 C1O.2 3210.74,3793 4178,3793 K12.1 ; 3642,5642 C2.2 3800,5735 4245,6180 4245,6240 4275,6270 4320,6270 4350,6240 4350,6206 4500,6056 IC2.4
  Bottom Layer w25: IC1.3 2957,5642 3642,5642
  Bottom Layer w50: RE1.A1 RE1.A1@1923.35,6032.36
  Bottom Layer w100: RE1.A1@1923.35,6032.36 2156.07,6032.36 2181.07,6057.36 2268.93,6057.36 2381.68,5944.61 2381.68,5938.78 2494.44,5826.02 2585.56,5826.02 2745.29,5985.75 2752.86,5985.75 2789.61,6022.5 C5.2@2830,6022.5
GND: B1.4 B2.4 C1.1 C1O.1 C2.1 C3.2 C4.1 C5.1 C6.2 C7.2 C8.2 C9.2 C11.2 C12.2 C13.2 D2.2 IC1.2 IC2.8 IC3.6 IC3.18 IC3.32 K3.1 K6.2 K7.3 K10.1 K11.6 K12.10 L2.2 R6.2 R8.2 R9.2 R10.1 R15.2 R20.2 T1.3 T4.3 T5.3 | length 17877.6
  Top Layer w10: T1.3 1349,5940 1339,5930 1339,5640.17 D2.2 1834.64,5144.54 C11.2 1950,5030 IC3.18 ; C4.1 3145.79,6015 3375.2,6015 3430.2,5960 R10.1 3430.2,5764.39 3364.8,5699 R6.2 ; IC3.6 3225,4990 3332,5097 ; C9.2 3315,3845 3091,3834 C1O.1 3200,4025 K10.1 3148,4177 3148,4657 3332,4841 3332,5097 ; C8.2 4005,4120 K12.10 4090,4305 R9.2 4112.56,4852.56 4112.56,4920.23 4217.88,5025.55 4331.02,5025.55 4385.46,5080 ; T5.3 3730,5808.74 C2.1 3605,5683.74 3605,5488.57 3554.54,5438.11 C3.2 3554.54,5319.54 3332,5097 ; C13.2 4090,5166 4120,5196 4360,5196 4385.46,5170.54 ; C7.2@4339.15,6500 4370.08,6500 4401,6500 4442,6459 4550,6459 4560,6469 R8.2 ; C6.2 4400.46,4985 4385.46,5000 4385.46,5080 ; R15.2 4402.4,5262.94 4385.46,5246 4385.46,5170.54 ; 4385.46,5080 C12.2 4385.46,5170.54
  Top Layer w30: T5.3 3730,6112 3735,6117 T4.3 3846,6260 3934.8,6171.2
  Top Layer w50: IC1.2 IC1.2@2950,5536.57
  Top Layer w85: IC1.2@2950,5536.57 2950,5689.35 3090.79,5830.14 C4.1
  Top Layer w100: C1.1 3080,6225.79 C4.1 ; R20.2@3947.56,6140 4045,6140 4222,6317 4284.74,6317 4339.15,6371.41 C7.2@4339.15,6500 ; L2.2 4370.08,6659.92 4370.08,6500
  Bottom Layer w10: K6.2 1575,3890 K11.6 1875,3840 2080,3840 K7.3 2593,3895 2613,3875 C1O.1 ; IC3.18 2051.58,5051.58 3144.49,5051.58 3156.07,5040 3156.07,5023.93 IC3.6 ; K10.1 3069,4256 3016.5,4256 IC3.32 2951.58,4444.08 3603.92,4444.08 3648,4400 3648,4360 3753,4255 K12.10 ; IC2.8 4280,6305
  Bottom Layer w30: 4280,6305 K3.1
  Bottom Layer w75: C5.1 3045,5925 ; C4.1 3055.79,5925 3045,5925 ; 3120,5850 3045,5925
  Bottom Layer w100: B1.4 2374,6935.55 2389.28,6920.28 B2.4 2629.72,6920.28 C1.1 ; 3120,5850 3715,5850 3760.67,5895.67 3760.67,5952
NetB1_2: B1.2 B2.3 K1.2 RE1.11 | length 2077.2
  Top Layer w100: RE1.11 2118.94,6614.57 2118.94,6546.06 2225,6440 B1.2
  Bottom Layer w100: K1.2 1555.24,7120.24 1658.52,7120.24 1716.73,7062.03 1716.73,7016.77 RE1.11 ; B1.2 2236.4,6345 2257.46,6366.06 2266.06,6366.06 2503.94,6603.94 2507.54,6603.94 B2.3@2528.6,6625 ; B2.3@2505,6625 B2.3@2528.6,6625 ; B2.3 B2.3@2528.6,6625
NetB1_3: B1.3 K2.1 RE1.22 | length 1223.4
  Bottom Layer w100: K2.1@1215,6520 1225,6530 1380,6530 1465,6615 RE1.22@1611.5,6615 ; RE1.22@1617.36,6612.64 1818.5,6411.5 1999.36,6411.5 2225,6637.13 B1.3
NetB2_1: B2.1 C4.2 IC1.1 | length 858.5
  Bottom Layer w100: B2.1 2736.48,6132.5 3113.13,6132.5 3189.21,6056.42 C4.2
NetB2_2: B2.2 K1.1 RE1.21 | length 3015.8
  Bottom Layer w100: K1.1 1195,6915.56 1085,6805.56 1085,6714.44 1149.44,6650 1240.56,6650 ; RE1.21 1468.83,6820.87 1401.48,6753.52 1297.97,6650 1240.56,6650 ; B2.2 2505.87,6363.86 2505.87,6446.7 2572.23,6513.07 2583.63,6513.07 2650,6579.44 2650,6670.56 2570.29,6750.28 2179.44,6750.28 2066.62,6637.46 2066.62,6634.31 1953.8,6521.5 1864.07,6521.5 1660.56,6725 1430,6725 1407.01,6747.99 1338.56,6747.99 1240.56,6650
NetC6_1: C6.1 IC3.9 R5.1 | length 1838.7
  Top Layer w10: v1(4234.45,4985.55) 4242.1,4977.9 4242.1,4953.45 4329.54,4866.02 4329.54,4727.46 R5.1
  Bottom Layer w10: IC3.9 2951.58,4928.42 3722.42,4928.42 3772,4978 4226.9,4978 v1(4234.45,4985.55)
NetC7_1: C7.1 IC2.5 R4.1 | length 2460.2
  Top Layer w10: v1(4249.54,6402) C7.1 ; IC2.5 4728,5997 4728,5329 4621.2,5329 4610.2,5340 R4.1
  Bottom Layer w10: v1(4249.54,6402) 4874,6402 4916,6360 4916,6260 4881,6225 IC2.5
NetC12_1: C12.1 IC3.10 R14.1 | length 2159.1
  Top Layer w10: R14.1 3787.6,5235.4 ; v1(3812,4938) 3787.6,4962.4 3787.6,5235.4 ; C12.1 4196,5120 4135,5059 3964,5059 3787.6,5235.4
  Bottom Layer w10: IC3.10 2882,4898 3772,4898 v1(3812,4938)
NetC13_1: C13.1 IC2.3 R13.1 | length 1428.2
  Top Layer w10: C13.1 4019.07,5154.07 4229,5364 4229,5639.35 4230,5640.35 4230,5814.85 4229,5815.85 4229,5854.47 4244.53,5870 4244.53,5940 4274.53,5970 4355,5970 IC2.3 4297.6,5822.6 R13.1
NetC14_1: C14.1 K11.3 | length 2203.2
  Top Layer w10: K11.3 2137,4002 2137,4400 2202,4465 2567,4465 2632,4400 2632,3636 2600,3604 2500,3604 C14.1
NetC14_2: C14.2 D3.2 IC3.29 | length 2347.8
  Top Layer w10: C14.2 2598,3650 2608,3660 2608,4333 2590,4351 IC3.29
  Bottom Layer w10: D3.2 1305,4191 1539,4425 2547.5,4425 IC3.29
NetD1_2: D1.2 RE1.A2 T1.1 | length 584.9
  Top Layer w10: D1.2 1617.36,5742.17
  Top Layer w30: T1.1 1465.2,5840 D1.2
  Top Layer w100: 1617.36,5742.17 RE1.A2
NetD2_1: D2.1 IC3.11 R3.1 R6.1 | length 2301.5
  Top Layer w10: IC3.11 3085,5385 R3.1 3290,5510.4 R6.1
  Bottom Layer w10: D2.1 1948,5417.17 1948,4960 1993,4915 2615,4915 IC3.11
NetIC2_1: IC2.1 R11.2 R14.2 | length 913.2
  Top Layer w10: R14.2 3954,5385 3995,5344 4100,5344 4112.4,5356.4 R11.2 4160,5390 4200,5430 4200,5638.64 4210,5648.64 4210,5806.57 4200,5816.57 IC2.1
NetIC2_2: IC2.2 R12.2 R15.1 | length 946.9
  Top Layer w10: R12.2 4117.4,5737.4 v1(4170,5790) ; IC2.2 4264.53,5889.53 4264.53,5860.47 4249,5844.94 4249,5824.14 4250,5823.14 4250,5632.07 4249,5631.07 4249,5440 4299,5390 R15.1
  Bottom Layer w10: v1(4170,5790) 4170,5792.5 4300,5922.5 IC2.2
NetIC2_6: IC2.6 R1.2 R8.1 | length 3583
  Top Layer w10: IC2.6 4464,6289 4699,6289 4748,6240 4748,5273.2 4674.8,5200 4674.8,5146.8 ; R8.1 4485.2,6541.2 4500,6556 4900,6556 4916,6540 4916,5388 4674.8,5146.8 ; R1.2 4674.8,5146.8
NetIC2_7: IC2.7 R1.1 R5.2 | length 2023.9
  Top Layer w10: R5.2 4560,4580 4600,4620 R1.1 v1(4450,5055)
  Bottom Layer w10: IC2.7 4450,6075 v1(4450,5055)
NetIC3_1: IC3.1 R19.2 | length 2303.5
  Top Layer w10: R19.2 v1(2279.8,4313)
  Bottom Layer w10: v1(2279.8,4313) 2585,4313 2632,4360 2632,4699 2732,4799 2732,5015.58 2748,5031.58 3120.42,5031.58 3132,5020 3132,4976.42 3160,4948.42 3648.42,4948.42 IC3.1
NetIC3_2: IC3.2 K7.2 R16.1 | length 3429.8
  Top Layer w10: K7.2 2335,3995 2335,4400 2360,4425 2407,4425 2432,4400 2432,4354 2490.2,4295.8 R16.1 ; v1(3376,4249) 3436,4309 3436,4836 IC3.2
  Bottom Layer w10: K7.2 2178,3838 3087,3838 3087,3920 3376,4209 v1(3376,4249)
NetIC3_5: IC3.5 IC3.31 L1.2 | length 1063.7
  Top Layer w10: L1.2 2790,4175.83 IC3.31 3290,4882.5 IC3.5
NetIC3_7: IC3.7 K5.1 | length 1282.7
  Top Layer w10: K5.1 2148,5195 2148,4933 2200,4881 2981,4881 IC3.7
NetIC3_8: IC3.8 K5.2 | length 1004.3
  Top Layer w10: K5.2 2260,5156 2248,5144 2248,4960 2260,4948 2948,4948 IC3.8
NetIC3_12: IC3.12 K9.1 | length 530
  Top Layer w10: IC3.12 K9.1
NetIC3_13: IC3.13 K9.2 | length 530
  Top Layer w10: IC3.13 K9.2
NetIC3_14: IC3.14 K9.3 | length 530
  Top Layer w10: IC3.14 K9.3
NetIC3_15: IC3.15 K9.4 | length 544.1
  Top Layer w10: IC3.15 2290,5084 2307,5101 2307,5340 2290,5357 K9.4
NetIC3_16: IC3.16 K9.5 | length 544.1
  Top Layer w10: IC3.16 2190,5084 2207,5101 2207,5340 2190,5357 K9.5
NetIC3_19: IC3.19 R7.1 | length 3054.9
  Top Layer w10: v1(3409,5488) 3409,5659.72 3547.56,5798.27 3547.56,6111.53 3540,6119.09 3540,6173 3520,6193 3480,6193 3430,6143 R7.1
  Bottom Layer w10: IC3.19 1890,5522 1935,5567 2724,5567 2803,5488 v1(3409,5488)
NetIC3_20: IC3.20 K4.1 | length 864
  Top Layer w10: K4.1 1720,4920 IC3.20
NetIC3_21: IC3.21 K4.2 | length 239.9
  Top Layer w10: IC3.21 1790,4185 K4.2
NetIC3_22: IC3.22 K4.3 | length 239.9
  Top Layer w10: IC3.22 1890,4185 K4.3
NetIC3_23: IC3.23 K6.4 | length 780.6
  Bottom Layer w10: K6.4 1485,4200 1538,4253 1860.5,4253 IC3.23
NetIC3_24: IC3.24 K6.3 | length 877.2
  Bottom Layer w10: K6.3 1524,3939 1770,3939 2090,4259 IC3.24
NetIC3_27: IC3.27 K11.1 | length 988.2
  Top Layer w10: K11.1 1960.51,3690 2019.51,3749 2160,3749 2390,3979 IC3.27
NetIC3_28: IC3.28 K11.4 | length 1298.4
  Top Layer w10: K11.4 1871,3744 1960,3744 2065.49,3849.49 2160,3849.49 2180.51,3870 2180.51,3919 2159,3940.51 2159,4188 2232,4261 2232,4400 2277,4445 2427.5,4445 IC3.28
NetIC3_30: IC3.30 K11.5 | length 969
  Bottom Layer w10: K11.5 2163,4128 2435.5,4128 IC3.30
NetIC3_33: IC3.33 K10.3 | length 261.6
  Top Layer w10: IC3.33 2990,4258 3000,4248 K10.3
NetIC3_34: IC3.34 K10.2 | length 261.6
  Top Layer w10: IC3.34 3090,4258 3100,4248 K10.2
NetIC3_35: IC3.35 K12.4 R22.2 | length 1648.1
  Top Layer w10: IC3.35 3190,4232.6 3344.2,4078.4 3445.8,4078.4 3457.4,4090 R22.2
  Bottom Layer w10: IC3.35 3243.5,4329 3440.5,4329 3814.5,3955 K12.4
NetIC3_36: IC3.36 K12.2 R21.2 | length 3649.5
  Top Layer w10: v1(2557.4,3753) R21.2
  Bottom Layer w10: v1(2557.4,3753) 2655.4,3655 4136,3655 4286,3805 4286,3905 4190,3905 K12.2 3854,3855 3400,4309 3174,4309 3148.42,4334.58 3148.42,4400 3172.5,4424.08 3227.92,4424.08 3253,4399 3273.5,4399 IC3.36
NetIC3_37: IC3.37 K12.3 | length 1027.1
  Bottom Layer w10: IC3.37 3430,4382.5 3807.5,4005 4190,4005 K12.3
NetIC3_38: IC3.38 K12.5 | length 885.7
  Bottom Layer w10: IC3.38 3767.5,4105 4190,4105 K12.5
NetIC3_39: IC3.39 K12.7 | length 744.2
  Bottom Layer w10: IC3.39 3767.5,4205 4190,4205 K12.7
NetIC3_40: IC3.40 K12.9 | length 602.8
  Bottom Layer w10: IC3.40 4112.5,4382.5 K12.9
NetK2_R: K2.2 RE1.12 RE1.24 | length 1363.7
  Top Layer w100: K2.2@1195,6330 1195,6339.03 1576.2,6720.24 1657.26,6720.24 1716.73,6779.71 1716.73,6862.03 1710,6868.76 1710,6928.23 RE1.24 ; 1710,6905 1802.64,6812.36 1802.64,6775.3 1912.64,6665.3 RE1.12
NetK3_T: K3.2 R2.2 R4.2 R9.1 R13.2 | length 3798.2
  Top Layer w10: R9.1 3814.54,4830 3751.58,4892.96 3751.58,5045.04 3745.04,5051.58 3745.04,5586.04 4321,6162 4353,6162 4354,6161 ; R13.2 4415,5655 4470,5600 4639.8,5600 4659.8,5620 ; R4.2 4685,5515 4659.8,5540.2 4659.8,5620 ; K3.2 4682,6322 4396,6322 4354,6280 4354,6161 ; 4354,6161 4659.8,5855.2 R2.2 4659.8,5620
NetK8_0: K8.1 L2.3 | length 272.8
  Bottom Layer w100: L2.3@4550,6780 4585.56,6780 ; 4617.78,6755 K8.1@4855,6755
NetK8_P: K8.2 L2.4 | length 341.9
  Bottom Layer w100: L2.4 4605,6955 K8.2@4855,6955
NetL2_1: L2.1 T3.2 | length 499.9
  Bottom Layer w80: T3.2 3860,6830 4080,6830 4140,6890 L2.1
NetR7_2: R7.2 R10.2 T1.2 | length 2584.9
  Top Layer w10: v1(3500,6143) 3500,6079.8 R7.2 3504.8,5955.2 R10.2
  Bottom Layer w10: T1.2 1659,5890 1966.5,6197.5 3445.5,6197.5 v1(3500,6143)
NetR11_1: R11.1 R12.1 | length 272.1
  Top Layer w10: R11.1 4037.6,5522 4042.6,5527 R12.1
NetR17_2: R17.2 T2.2 T4.1 T5.2 | length 1008.8
  Top Layer w10: 3930,6344 3942.4,6356.4
  Top Layer w30: T2.2 3675,6483 ; T5.2 3680,6092 3635,6137 T4.1 3635,6390 3675,6430 3675,6483 ; 3930,6344 3906,6320 3838,6320 3675,6483 ; 3942.4,6356.4 R17.2
NetR18_1: R18.1 T2.3 T5.1 | length 853.1
  Top Layer w25: T2.3 3805,6640 R18.1
  Bottom Layer w25: T5.1 3575,6025 3575,6289 3725,6439 T2.3
NetR18_2: R18.2 T3.1 | length 291.3
  Top Layer w10: R18.2 R18.2@3960,6655.2
  Top Layer w25: R18.2@3960,6655.2 T3.1
NetR19_1: R19.1 R20.1 T4.2 | length 3840.2
  Top Layer w10: v1(2205,3992) R19.1 ; v1(3713,4812) 3731.58,4830.58 3731.58,5032 3718,5045.58 3718,5654 3860,5796 3860,6080 ; v1(3784,6037) 3817,6037 3860,6080 ; R20.1 3860,6080
  Bottom Layer w10: v1(2205,3992) 2602,3992 2832,4222 2832,4404 3240,4812 v1(3713,4812) ; T4.2 3685,6136 v1(3784,6037)
VIN: B1.1 C1.2 R3.2 R17.1 T2.1 T3.3 | length 4813.4
  Top Layer w10: R3.2 3459,5385 3570,5496
  Top Layer w30: 3570,5496 3570,5778.29 3577.56,5785.85 3577.56,6123.96 3570,6131.51 3570,6505 T2.1 3625,6790 T3.3 3829,6994 4018.43,6994 4036,6976.43 4036,6617 3867.6,6448.6 R17.1
  Top Layer w100: B1.1 2225,6189.44 2554.5,6518.94 2734.94,6518.94 C1.2
  Bottom Layer w90: 3141,6925 T3.3
  Bottom Layer w100: C1.2 3141,6925
pads on no net: IC3.3 IC3.4 IC3.25 IC3.26 K12.6 K12.8 RE1.14

## Silkscreen, mask and mechanical layers (free items; w line width, h text height)
Top Overlay:
  lines w10: 1125,4310 1520,4310 1520,5345 1125,5345 1125,4310
  text "P" at 4695,6950 h60 r90
  text "O" at 1380,6910 h60
  text "O" at 4685,6730 h60 r90
  text "Y" at 1380,6710 h60
  text "B" at 1370,6490 h60
  text "T" at 4690,6480 h60 r90
  text "R" at 1380,6275 h60
  text "GND" at 4685,6215 h60 r90
  text "Soldering station" at 1404.99,5310 h60 r270
  text "Jasper Maes" at 1194.99,5305 h60 r270
  text "Electronics-ICT 1" at 1295,5305 h60 r270
  text "GND" at 3890,4245 h60
  text "5V" at 4420,3825 h60
Mechanical 1:
  lines w47.24: 1000,3440 1000,7275 5070,7275 5070,3440 1000,3440

## Text inside footprints (layer, text, board x,y; h text height)
K9: Top Overlay "5" at 2204.96,5453.07 h40 r180; Top Overlay "1" at 2594.72,5453.07 h40 r180